# Altium PCB PV_PCB2.PcbDoc
Units mil, origin at the board's own origin, x right, y up, seen from the top; angles counter-clockwise.
Board outline 6055 x 4425 mil, 2 copper layers (Top Layer, Bottom Layer); 127 components, 83 nets, 389 pads, 37 vias.
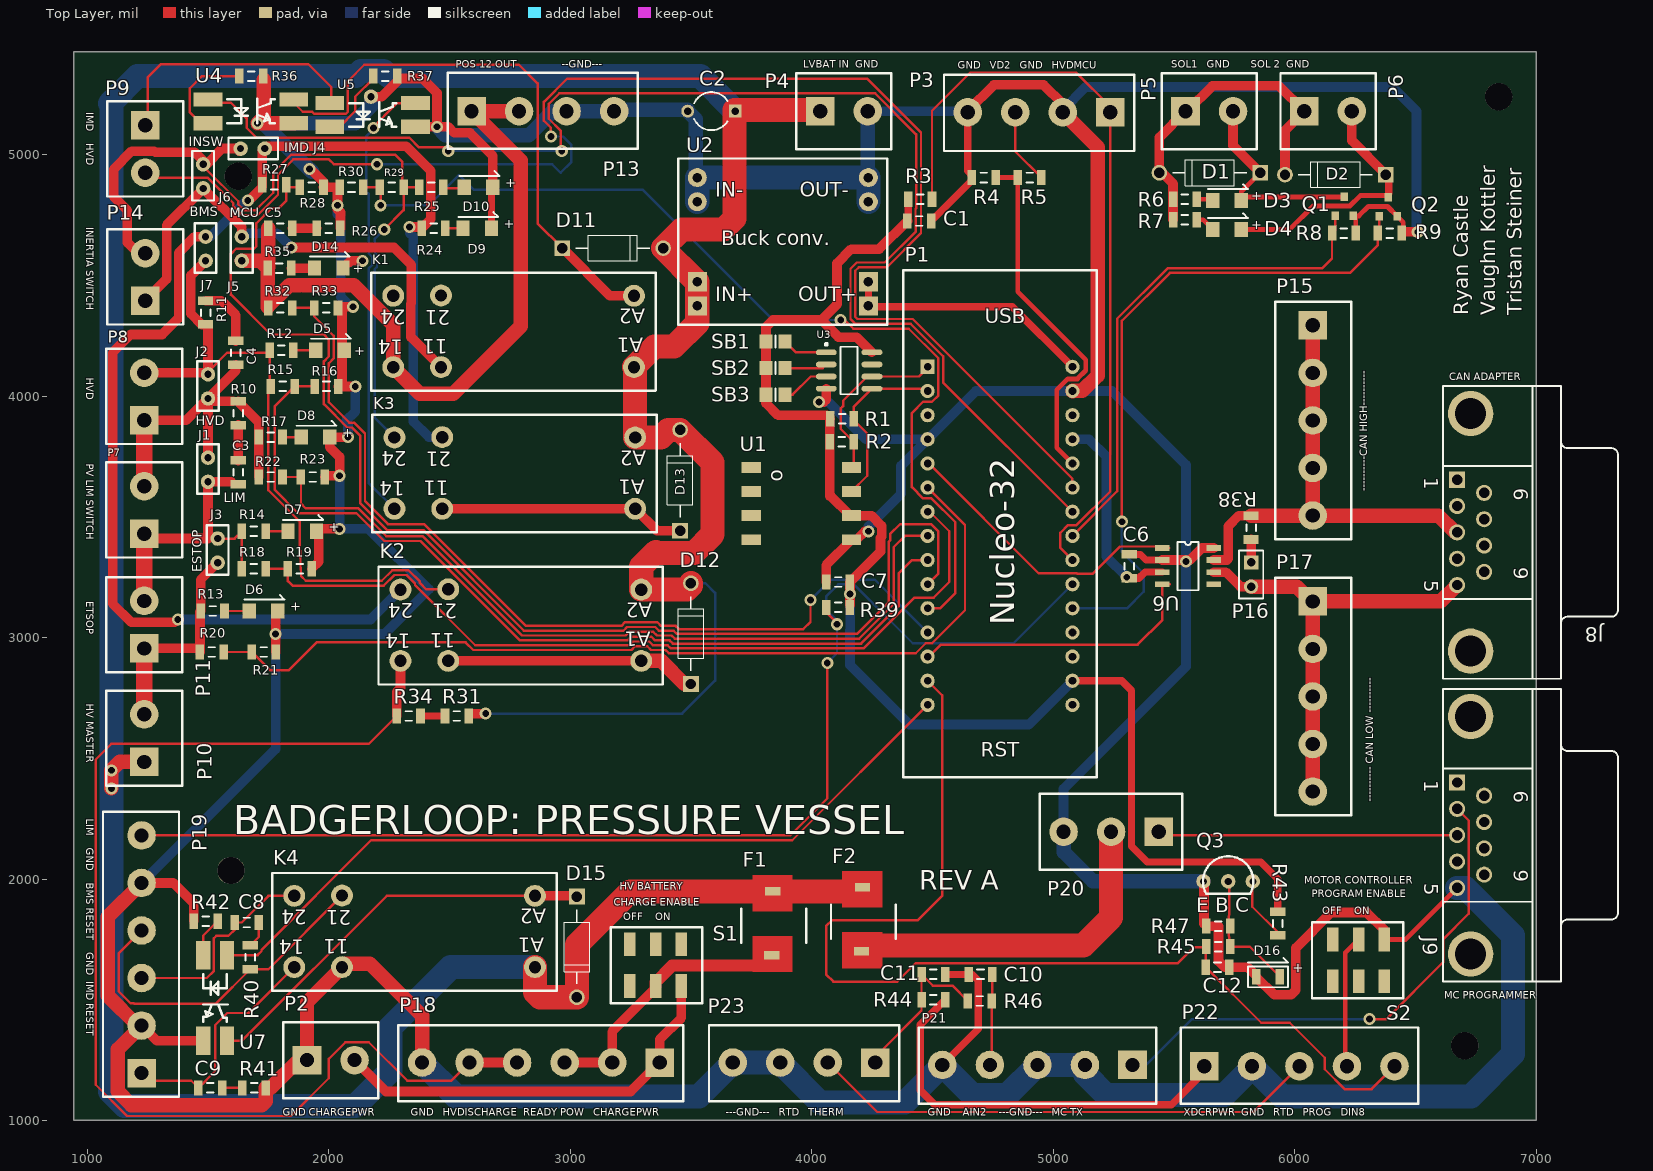
[diagram p0: Top Layer view]
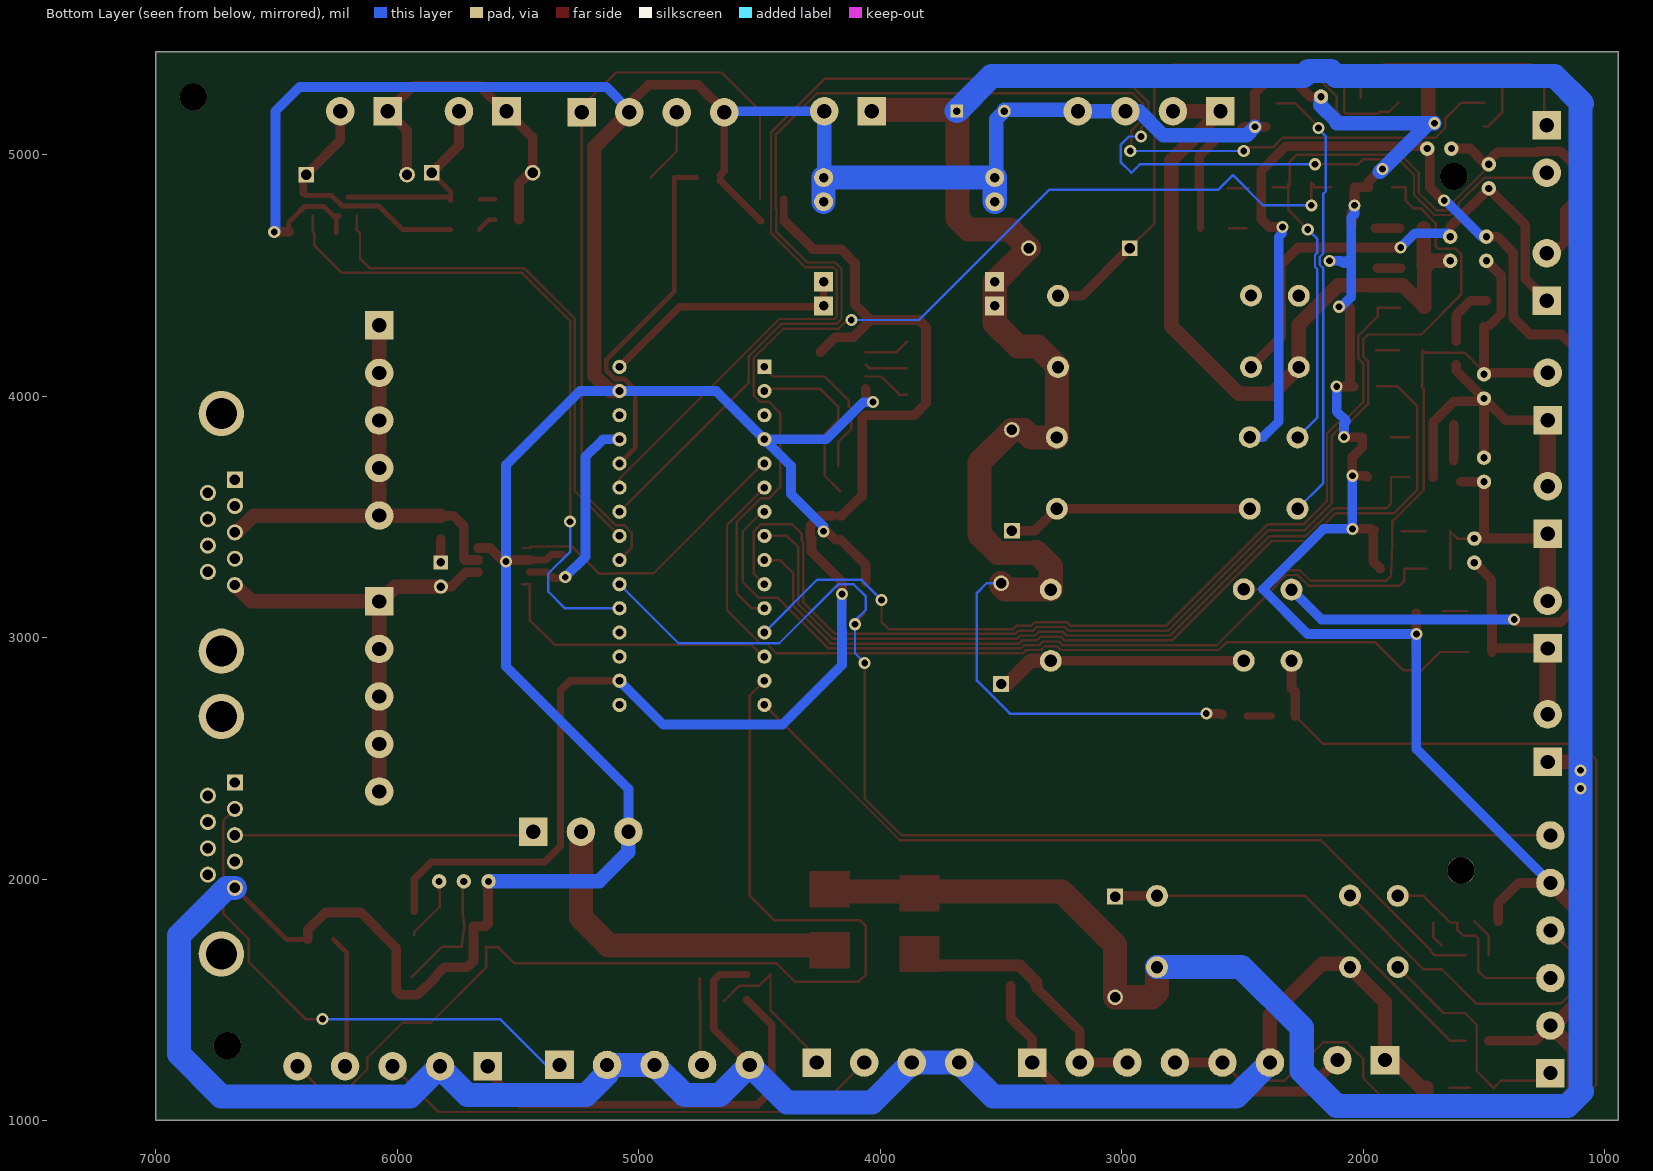
[diagram p1: Bottom Layer view, seen from below]

## Layer stack, top to bottom
Top Solder: solder mask 0.4, Solder Resist, Dk 3.5
Top Layer: signal copper 1.4
Dielectric 1: dielectric 12.6, FR-4, Dk 4.8
Bottom Layer: signal copper 1.4
Bottom Solder: solder mask 0.4, Solder Resist, Dk 3.5

## Board outline
945,1000 7000,1000 7000,5425 945,5425

## Design rules (kind name [scope] priority, off if disabled: settings)
Clearance [All] p1: gap=10 ignorepadtopadclearanceinfootprint=FALSE except(0: Arc-Hole Track-Hole SMDPad-Hole THPad-Hole Via-Hole Fill-Hole Poly-Hole Region-Hole Text-Hole)
HoleSize [All] p1: absolutevalues=TRUE maxlimit=200 minlimit=1 maxpercent=80.000 minpercent=20.000
PolygonConnect [All] p1: connectstyle=Relief reliefconductorwidth=10 reliefentries=4 polygonreliefangle="90 Angle" airgapwidth=10
RoomDefinition PV_MCU_IO [InComponentClass('PV_MCU_IO')] p1: confinementstyle=ConfineIn formatcopy=TRUE lockcomponents=FALSE outline 720,855 7650,855 7650,5580.94 720,5580.94
RoomDefinition PV_Shutdown_2 [InComponentClass('PV_Shutdown_2')] p2: confinementstyle=ConfineIn formatcopy=TRUE lockcomponents=FALSE outline 785,615 5967.87,615 5967.87,5520 785,5520
RoomDefinition PV_Shutdown [InComponentClass('PV_Shutdown')] p3: confinementstyle=ConfineIn formatcopy=TRUE lockcomponents=FALSE outline 869.21,670 7685,670 7685,5485 869.21,5485
RoomDefinition PV_MotorIO [InComponentClass('PV_MotorIO')] p4: confinementstyle=ConfineIn formatcopy=TRUE lockcomponents=FALSE outline 740,765 7675,765 7675,5505 740,5505
RoomDefinition PV_BMS_IO [InComponentClass('PV_BMS_IO')] p5: confinementstyle=ConfineIn formatcopy=TRUE lockcomponents=FALSE outline 565,1055 7700,1055 7700,5515 565,5515
RoutingVias [All] p1: holewidth=28 width=50 viastyle="Through Hole" minholewidth=28 minwidth=50 maxholewidth=28 maxwidth=50
SilkToSolderMaskClearance [IsPad] p1: minsilkscreentomaskgap=5 clearancetoexposedcopper=TRUE
SolderMaskExpansion [All] p1: expansion=4
Width [All] p1: maxlimit=100 minlimit=10 preferedwidth=10 minimp=50.000000 maximp=50.000000 favimp=50.000000
28 further rules are at their usual default settings.

## Classes and differential pairs
component class PV_Shutdown: C3 C4 C5 D5 D6 D7 D8 D9 D10 D11 D12 D13 D14 J1 J2 J3 J4 J5 J6 J7 K1 K2 K3 P7 P8 P9 P10 P11 P13 P14 R10 R11 R12 R13 R14 R15 R16 R17 R18 R19 R20 R21 R22 R23 R24 R25 R26 R27 R28 R29 R30 R31 R32 R33 R34 R35 R36 R37 U4 U5
component class PV_Shutdown_2: C7 C8 C9 D15 K4 P19 R39 R40 R41 R42 U7
component class PV_MotorIO: C10 C11 C12 D16 F2 J9 P20 P21 P22 P23 Q3 R43 R44 R45 R46 R47 S2
component class PV_MCU_IO: C1 C2 D1 D2 D3 D4 P1 P2 P3 P4 P5 P6 Q1 Q2 R1 R2 R3 R4 R5 R6 R7 R8 R9 SB1 SB2 SB3 U1 U2 U3
component class PV_BMS_IO: C6 F1 J8 P15 P16 P17 P18 R38 S1 U6

## Components (designator, comment, footprint, x,y, rotation, side; value= is the part's Value field where it differs from the comment)
C1 "Cap" 1206 4396.57,4725 r0 top value=100pF
C2 "Cap" CAPR5-4X5 3585,5180 r180 top value=220uF
C3 "Cap" 1206 1625,3635 r90 top value=100nF
C4 "Cap" 1206 1615,4130 r90 top value=100nF
C5 "Cap" 1206 1750,4695 r0 top value=100nF
C6 "Cap" 1206 5315,3344.37 r270 top value=1uF
C7 "Cap" 1206 4060,3230 r0 top value=100pF
C8 "Cap" 1206 1611.57,1820 r0 top value=100nF
C9 "Cap" 1206 1460,1135 r0 top value=100nF
C10 "Cap" 1206 4650,1605 r0 top value=1000pF
C11 "Cap" 1206 4553.43,1605 r180 top value=4700pF
C12 "Cap" 1206 5730,1635 r180 top value=100pF
D1 "Flyback" 1N4007 5854.86,4927.87 r180 top
D2 "Flyback" 1N4007 6375,4920 r180 top
D3 "LED1" "1206 LED" 5720,4810 r0 top
D4 "LED2" "1206 LED" 5720,4690 r0 top
D5 "LED1" "1206 LED" 2005,4190 r0 top
D6 "LED1" "1206 LED" 1730,3110 r0 top
D7 "LED1" "1206 LED" 1890,3440 r0 top
D8 "LED1" "1206 LED" 1945,3830 r0 top
D9 "LED1" "1206 LED" 2615,4695 r0 top
D10 "LED1" "1206 LED" 2620,4865 r0 top
D11 "Diode" 1N4007 2970,4610 r0 top
D12 "Diode" 1N4007 3502.87,2810.14 r90 top
D13 "Diode" 1N4007 3457.87,3445.14 r90 top
D14 "LED1" "1206 LED" 2000,4530 r0 top
D15 "Diode" 1N4007 3025,1925 r270 top
D16 "Diode" "1206 DIODE" 5890,1595 r0 top
F1 "3A Fuse" "1A FUSE HOLDER" 3921.61,1614.13 r90 top
F2 "Fuse 3A" "1A FUSE HOLDER" 4292.68,1630.35 r90 top
J1 "S1011EC-02-ND" "2 Pin Jumper" 1500,3645 r90 top
J2 "S1011EC-02-ND" "2 Pin Jumper" 1500,3990 r90 top
J3 "S1011EC-02-ND" "2 Pin Jumper" 1540,3310 r90 top
J4 "S1011EC-02-ND" "2 Pin Jumper" 1635,5025 r0 top
J5 "S1011EC-02-ND" "2 Pin Jumper" 1640,4560 r90 top
J6 "S1011EC-02-ND" "2 Pin Jumper" 1480,4860 r90 top
J7 "S1011EC-02-ND" "2 Pin Jumper" 1490,4560 r90 top
J8 "D Connector 9" DSUB1.385-2H9 7103.11,3435.47 r270 top
J9 "D Connector 9" DSUB1.385-2H9 7103.11,2181.42 r270 top
K1 "RT444012F-ND" RT444012F 2263,-2670 r90 top
K2 "RT444012F-ND" RT444012F 2292.99,-3886.61 r90 top
K3 "RT444012F-ND" RT444012F 2267.99,-3256.61 r90 top
K4 "RT444012F-ND" RT444012F 1853,-5155 r90 top
P1 "NUCLEO-L432KC" NUCLEO-32 4480,4120.94 r0 top
P2 "Power" "2POS TERM BLOCK" 1910,1250 r0 top
P3 "Header 4" "4POS TERM BLOCK" 5236.85,5175 r180 top
P4 "Battery Input" "2POS TERM BLOCK" 4035,5180 r0 top
P5 "Solenoid 8" "2POS TERM BLOCK" 5548.15,5180 r0 top
P6 "Solenoid 8" "2POS TERM BLOCK" 6040,5180 r0 top
P7 "PV Limit Switch" "2POS TERM BLOCK" 1235.94,3430 r90 top
P8 "HVD Interlock" "2POS TERM BLOCK" 1235.94,3900 r90 top
P9 "Battery Input" "2POS TERM BLOCK" 1240,5121.85 r270 top
P10 "HVMaster" "2POS TERM BLOCK" 1235.94,2485 r90 top
P11 "EStop1" "2POS TERM BLOCK" 1235.94,2955 r90 top
P13 "277-5738-ND" "4POS TERM BLOCK" 2591.3,5179.33 r0 top
P14 "Inertia Switch-NC" "2POS TERM BLOCK" 1240,4395 r90 top
P15 "Header 5" "5POS TERM BLOCK" 6075,4292.8 r270 top
P16 "TERM" HDR1X2 5820,3310.94 r270 top
P17 "Header 5" "5POS TERM BLOCK" 6075,3149.65 r270 top
P18 "Header 6" "6POS TERM BLOCK" 3370.55,1240 r180 top
P19 "Header 6" "6POS TERM BLOCK" 1225,1196.3 r90 top
P20 "Header 3" "3POS TERM BLOCK" 5436.85,2195.94 r180 top
P21 "Header 5" "5POS TERM BLOCK" 5328.7,1230 r180 top
P22 "Header 5" "5POS TERM BLOCK" 5626.3,1224.96 r0 top
P23 "Header 4" "4POS TERM BLOCK" 4263.7,1240 r180 top
Q1 "MOSFET-N" SOT-23-3 6205,4825 r0 top
Q2 "MOSFET-N" SOT-23-3 6387.4,4823.74 r0 top
Q3 "2N3904" BJT 5622.64,1990 r0 top
R1 "Res1" 1206 4175,3905.94 r180 top value=120
R2 "Res1" 1206 4173.43,3810.94 r180 top value=120
R3 "Res1" 1206 4498.43,4815 r180 top value=1K
R4 "Res1" 1206 4663.15,4905 r0 top value=2.2K
R5 "Res1" 1206 4853.15,4905 r0 top value=1K
R6 "Res1" 1206 5595,4815 r180 top value=1K
R7 "Res1" 1206 5595,4730 r180 top value=1K
R8 "Res1" 1206 6253.43,4675 r180 top value=10K
R9 "Res1" 1206 6443.43,4675 r180 top value=10K
R10 "Res1" 1206 1625,3880 r90 top value=1K
R11 "Res1" 1206 1490,4395 r270 top value=1K
R12 "Res1" 1206 1755,4190 r0 top value=1K
R13 "Res1" 1206 1470,3110 r0 top value=1K
R14 "Res1" 1206 1640,3440 r0 top value=1K
R15 "Res1" 1206 1858.43,4040 r180 top value=.3793K
R16 "Res1" 1206 2040,4040 r180 top value=1K
R17 "Res1" 1206 1710,3830 r0 top value=1K
R18 "Res1" 1206 1738.43,3285 r180 top value=.3793K
R19 "Res1" 1206 1929.53,3285 r180 top value=1K
R20 "Res1" 1206 1565,2940 r180 top value=.3793K
R21 "Res1" 1206 1780,2940 r180 top value=1K
R22 "Res1" 1206 1808.43,3665 r180 top value=.3793K
R23 "Res1" 1206 1983.43,3665 r180 top value=1K
R24 "Res1" 1206 2385,4695 r0 top value=1K
R25 "Res1" 1206 2375,4865 r0 top value=1K
R26 "Res1" 1206 1950,4695 r0 top value=2K
R27 "Res1" 1206 1823.43,4875 r180 top value=.3793K
R28 "Res1" 1206 1978.43,4865 r180 top value=1K
R29 "Res1" 1206 2211.57,4865 r0 top value=.3793K
R30 "Res1" 1206 2045,4865 r0 top value=1K
R31 "Res1" 1206 2580,2675 r180 top value=1K
R32 "Res1" 1206 1848.43,4365 r180 top value=.3793K
R33 "Res1" 1206 2038.43,4365 r180 top value=1K
R34 "Res1" 1206 2281.57,2675 r0 top value=0
R35 "Res1" 1206 1845,4530 r180 top value=1K
R36 "Res1" 1206 1630,5325 r0 top value="180 Ohm"
R37 "Res1" 1206 2185,5325 r0 top value="48.7 Ohm"
R38 "Res1" 1206 5820,3405.94 r90 top value=120
R39 "Res1" 1206 4060,3125 r0 top value=1K
R40 "Res1" 1206 1675,1626.57 r90 top value=1K
R41 "Res1" 1206 1740,1135 r180 top value=1K
R42 "Res1" 1206 1540,1825 r180 top value="180 Ohm"
R43 "Res1" 1206 5930,1766.57 r90 top value=10K
R44 "Res1" 1206 4455,1500 r0 top value=300K
R45 "RES1" 1206 5635,1720 r0 top value=10.0K
R46 "Res1" 1206 4646.57,1495 r0 top value=41.2K
R47 "Res1" 1206 5635,1805 r0 top value=4.7K
S1 "JS202011SCON" JS202011SCON 3452.13,1556.77 r180 top
S2 "JS202011SCON" JS202011SCON 6166.57,1750 r0 top
SB1 "Res1" 6-0805_M 3850,4225.94 r180 top value=0
SB2 "Res1" 6-0805_M 3850,4115.94 r180 top value=0
SB3 "Res1" 6-0805_M 3850,4005.94 r180 top value=0
U1 "SSCMNNN030PA2A3" 8-SMT 3750,3405 r90 top
U2 "MP1584EN Breakout Board" "MP1584EN BREAKOUT" 3526.34,4905 r0 top
U3 "CAT24C32" SO8_N 4155,4105.94 r0 top
U4 "TPC817" 4-SOP 1500,5228.43 r0 top
U5 "TPC817" 4-SOP 2005,5213.43 r0 top
U6 "MCP2561" 8-SOIC 5452.4,3370.94 r0 top
U7 "TPC817" 4-SOP 1578.43,1685 r270 top

## Footprints (in the part's own frame and the unit in brackets; to place one, negate y for a bottom-side part, rotate by r counter-clockwise, add the part's x,y. Pads: shape width x height; smd on the part's side, far side on the other; paste and mask are expansions set on the pad)
"1A FUSE HOLDER" [mm] "0154001.DR"
  rect 0.9x1.6 smd: 1(1.8,2.2) 2(8.5,2.1)
  Top Layer region: 6.4,0 10.21,0 10.21,4.24 6.4,4.24
  Top Layer region: 0,0 3.81,0 3.81,4.24 0,4.24
  silkscreen extent 3.1,-1.4 6.7,5.4
1N4007 [mm] "DIODE"
  rect 1.65x1.65 hole 1.1: 1(-0.063,0.073)
  round 1.65 hole 1.1: 2(10.537,0.073)
  silkscreen extent 1.34,-1.28 9.14,1.42
"2 Pin Jumper" [mil]
  round 60 hole 30: 1(0,0) 2(100,0)
  silkscreen extent -50,-45 155,45, body extent -50,-51 150,45, height 344
"2POS TERM BLOCK" [mm] "5mm Pitch"
  rect 3x3 hole 1.5: 1(0,0)
  round 3 hole 1.5: 2(5,0)
  silkscreen extent -2.5,-4 7.5,4, body extent -2.51,-4.57 8.09,4.43, height 12.6
"3POS TERM BLOCK" [mm] "5mm Pitch"
  rect 3x3 hole 1.5: 1(0,0)
  round 3 hole 1.5: 2(5,0) 3(10,0)
  silkscreen extent -2.5,-4 12.5,4, body extent -3.03,-4.56 12.49,4.44, height 12.6
4-SOP [mm] "TPC817"
  rect 3x1.5 smd: 1(0,0) 2(0,-2.5) 3(9,0) 4(9,-2.5)
  silkscreen extent 2,-2.5 7,0.1, body extent -0.7,-3.7 9.6,1, height 2
"4POS TERM BLOCK" [mm]
  rect 3x3 hole 1.5: 1(0,0)
  round 3 hole 1.5: 2(5,0) 3(10,0) 4(15,0)
  silkscreen extent -2.5,-3.94 17.5,4.06, body extent -2.55,-4.55 18.05,4.45, height 3.8
"5POS TERM BLOCK" [mm]
  rect 3x3 hole 1.5: 1(0,0)
  round 3 hole 1.5: 2(5,0) 3(10,0) 4(15,0) 5(20,0)
  silkscreen extent -2.5,-3.94 22.5,4.06
6-0805_M [mm] "Chip Resistor, Body 2.0x1.2mm, IPC Low Density"
  rect 1.4x1.5 smd: 1(-1,0) 2(1,0)
  silkscreen extent 0,-0.65 0,0.65, body extent -1.07,-0.7 1.07,0.7, height 0.7
"6POS TERM BLOCK" [mm] "5mm"
  rect 3x3 hole 1.5: 1(0,0)
  round 3 hole 1.5: 2(5,0) 3(10,0) 4(15,0) 5(20,0) 6(25,0)
  silkscreen extent -2.5,-3.94 27.5,4.06, body extent -3.11,-4.55 27.49,4.45, height 12.87
8-SMT [mm]
  rect 1.15x2.04 smd: 1(0,-10.54) 2(2.54,-10.54) 3(5.08,-10.54) 4(7.62,-10.54) 5(7.62,0) 6(5.08,0) 7(2.54,0) 8(0,0)
  body extent -1.35,-12 8.55,1.46, height 5.44
8-SOIC [mm]
  rect 1.55x0.6 smd: 1(0,0) 2(0,-1.27) 3(0,-2.54) 4(0,-3.81) 5(5.4,-3.81) 6(5.4,-2.54) 7(5.4,-1.27) 8(5.4,0)
  silkscreen extent 1.61,-4.44 3.79,0.64
1206 [mm] "1206 SMD Resistor"
  rect 0.9x1.6 smd: 1(0,0) 2(2.5,0)
  silkscreen extent 0.9,-0.5 1.6,0.5
"1206 DIODE" [mm]
  rect 0.9x1.6 smd: 1(-1.25,0) 2(1.25,0)
  silkscreen extent -2.1,-1.1 2.1,2, body extent -1.4,-0.8 1.5,0.8, height 1
"1206 LED" [mm]
  rect 1.4x1.6 smd: 1(-1.5,0) 2(1.5,0)
  silkscreen extent -2,1.2 2.2,1.7, body extent -1.4,-0.8 1.5,0.8, height 1
BJT [mil]
  round 60 hole 30: 1(0,0) 2(102.36,0) 3(204.72,0)
  silkscreen extent -2,-50 207,104
CAPR5-4X5 [mm] "Capacitor; 2 Leads"
  rect 1.35x1.35 hole 0.8: 1(-2.5,0)
  round 1.35 hole 0.8: 2(2.5,0)
  silkscreen extent -1.69,-2 1.82,2
DSUB1.385-2H9 [mm] "Connector; D Subminiature; 9 Position; Right Angle; Pitch 1.385 mm"
  rect 1.69x1.69 hole 1.09: 1(-5.54,-10.92)
  round 1.69 hole 1.09: 2(-2.77,-10.92) 3(0,-10.92) 4(2.77,-10.92) 5(5.54,-10.92) 6(-4.155,-8.08) 7(-1.385,-8.08) 8(1.385,-8.08) 9(4.155,-8.08)
  round 4.76 hole 3.26: 10(-12.495,-9.5) 11(12.495,-9.5)
  silkscreen extent -15.4,-12.4 15.4,6
HDR1X2 [mm] "Connector; Header; 2 Position"
  rect 1.5x1.5 hole 0.9: 1(0,0)
  round 1.5 hole 0.9: 2(2.54,0)
  silkscreen extent -1.27,-1.27 3.81,1.27
JS202011SCON [mm]
  rect 1.2x2.5 smd: 1(-0.2,-4.4) 2(2.5,-4.4) 3(5.2,-4.4) 4(5.2,0) 5(2.5,0) 6(-0.2,0)
  silkscreen extent -2.4,-6.2 7.2,1.8, body extent -2.1,-5.8 6.9,1.26, height 4.27
"MP1584EN BREAKOUT" [mm] "Buck Converter"
  round 2 hole 1: 0(0,-2.54) 0(0,0) 2(18,-2.54) 2(18,0)
  rect 2x2 hole 1: 1(0,-13.5) 1(0,-10.96) 3(18,-13.5) 3(18,-10.96)
  silkscreen extent -2,-15.5 20,2
NUCLEO-32 [mm]
  rect 1.5x1.5 hole 0.8: 1(0,0)
  round 1.5 hole 0.8: 2(0,-2.54) 3(0,-5.08) 4(0,-7.62) 5(0,-10.16) 6(0,-12.7) 7(0,-15.24) 8(0,-17.78) 9(0,-20.32) 10(0,-22.86) 11(0,-25.4) 12(0,-27.94) 13(0,-30.48) 14(0,-33.02) 15(0,-35.56) 16(15.24,-35.56) 17(15.24,-33.02) 18(15.24,-30.48) 19(15.24,-27.94) 20(15.24,-25.4) 21(15.24,-22.86) 22(15.24,-20.32) 23(15.24,-17.78) 24(15.24,-15.24) 25(15.24,-12.7) 26(15.24,-10.16) 27(15.24,-7.62) 28(15.24,-5.08) 29(15.24,-2.54) 30(15.24,0)
  silkscreen extent -2.54,-43.18 17.78,10.16, body extent -1.67,-40.6 16.87,9.69, height 5
RT444012F [mm] "RELAY GEN PURPOSE DPST 8A 12V"
  round 2.3 hole 1.3: 1(172.466,-25.425) 2(179.966,-25.425) 3(172.466,-5.131) 4(172.466,-0.102) 5(180,-5.131) 6(179.966,-0.102)
  silkscreen extent 169.98,-27.71 182.37,2.21, body extent 170.3,-27.3 182.1,1.9, height 10
SO8_N [mm] "SOIC, 8-Leads, Body 4.9x3.9mm, Pitch 1.27mm, IPC Medium Density"
  oval 2.2x0.6 smd: 1(-2.4,1.905) 2(-2.4,0.635) 3(-2.4,-0.635) 4(-2.4,-1.905) 5(2.4,-1.905) 6(2.4,-0.635) 7(2.4,0.635) 8(2.4,1.905)
  silkscreen extent -2.52,-2.5 0.9,2.88, body extent -2,-2.5 2,2.5, height 1.75
SOT-23-3 [mm] "MOSFET"
  rect 0.8x0.9 smd: D(0,0) G(-0.95,-2) S(0.95,-2)

## Part data
C1 C2 C3 C4 C5 C6 C7 C8 C9 C10 C11 C12: "Capacitor", LatestRevisionDate=17-Jul-2002, LatestRevisionNote="Re-released for DXP Platform.", PackageDescription="Radial Cap, Thru-Hole; 2 Leads; 0.3 in Pin Spacing", PackageReference=RAD-0.3, Published=8-Jun-2000, Publisher="Altium Limited"
D1 D2: library part Diode, "Default Diode", Code_JEDEC=DO-214-AB, LatestRevisionDate=17-Jul-2002, LatestRevisionNote="Re-released for DXP Platform.", PackageDescription="DO-214-AB/SMC; 2 C-Bend Leads; Body 7.9 x 5.9 mm, inc. leads (LxW)", PackageReference=SMC, PackageVersion=Sep-1996, Published=8-Jun-2000, Publisher="Altium Limited"
D3: library part LED2, "Typical RED, GREEN, YELLOW, AMBER GaAs LED", LatestRevisionDate=17-Jul-2002, LatestRevisionNote="Re-released for DXP Platform.", PackageDescription="SM LED; 2 Flat Leads", PackageReference=3.2X1.6X1.1, PackageVersion=Feb-2002, Published=8-Jun-2000, Publisher="Altium Limited"
D4: "Typical RED, GREEN, YELLOW, AMBER GaAs LED", LatestRevisionDate=17-Jul-2002, LatestRevisionNote="Re-released for DXP Platform.", PackageDescription="SM LED; 2 Flat Leads", PackageReference=3.2X1.6X1.1, PackageVersion=Feb-2002, Published=8-Jun-2000, Publisher="Altium Limited"
D5 D6 D7 D8 D9 D10 D14: "Typical RED GaAs LED", LatestRevisionDate=08-Jul-2005, LatestRevisionNote="Mech Layer 1 removed.", PackageDescription="LED; 2 Leads", PackageReference=LED-1, Published=8-Jun-2000, Publisher="Altium Limited"
D11 D12 D13 D15 D16: "Default Diode", Code_JEDEC=DO-214-AB, LatestRevisionDate=17-Jul-2002, LatestRevisionNote="Re-released for DXP Platform.", PackageDescription="DO-214-AB/SMC; 2 C-Bend Leads; Body 7.9 x 5.9 mm, inc. leads (LxW)", PackageReference=SMC, PackageVersion=Sep-1996, Published=8-Jun-2000, Publisher="Altium Limited"
F1 F2: library part "Fuse 1", "Fuse", LatestRevisionDate=17-Jul-2002, LatestRevisionNote="Re-released for DXP Platform.", PackageDescription="Thru-Hole; 2 Leads", PackageReference=PIN-W2/E2.8, Published=8-Jun-2000, Publisher="Altium Limited"
  F1: ComponentLink1Description=Digikey, ComponentLink1URL=F1226CT-ND
  F2: ComponentLink1Description="Digikey- FUSE", ComponentLink1URL=https://www.digikey.com/product-detail/en/littelfuse-inc/0451001.MRL/F2577CT-ND/813055, ComponentLink2Description="Digikey - Holder", ComponentLink2URL=https://www.digikey.com/product-detail/en/littelfuse-inc/0154001.DR/F1222TR-ND/183352
J1 J2 J3 J4 J5 J6 J7: "CONN HEADER .100\" SNGL STR 2POS", ComponentLink1Description="Male- Digikey", ComponentLink1URL=https://www.digikey.com/product-detail/en/sullins-connector-solutions/PRPC002SAAN-RC/S1011EC-02-ND/2775252, ComponentLink2Description="Female - Digikey", ComponentLink2URL=https://www.digikey.com/products/en?keywords=S9001-ND
J8 J9: "Receptacle Assembly, 9 Position, Right Angle", PackageDocument=O, DatasheetDocument=1-Sep-1999, Gender=Receptacle, LatestRevisionDate=17-Jul-2002, LatestRevisionNote="Re-released for DXP Platform.", Orientation="Right Angle", PackageReference=788750, Positions=9, Published=15-Jun-2001, Publisher="Altium Limited"
K1 K2 K3 K4: "RELAY GEN PURPOSE DPST 8A 12V", ComponentLink1Description=Digikey, ComponentLink1URL=https://www.digikey.com/product-detail/en/te-connectivity-potter-brumfield-relays/RT444012F/RT444012F-ND/1427665
P1: "STM32L432KC Development Board", ComponentLink1Description=MBED, ComponentLink1URL=https://os.mbed.com/platforms/ST-Nucleo-L432KC/, ComponentLink2Description=Digikey, ComponentLink2URL=https://www.digikey.com/products/en?keywords=NUCLEO-L432KC
P2 P4 P5 P6 P9 P16: library part "Header 2", "Header, 2-Pin", LatestRevisionDate=17-Jul-2002, LatestRevisionNote="Re-released for DXP Platform.", Publisher="Altium Limited"
P3 P23: "Header, 4-Pin", LatestRevisionDate=17-Jul-2002, LatestRevisionNote="Re-released for DXP Platform.", Publisher="Altium Limited"
P7 P8 P10 P11 P14: library part "Header 2", "277-5733-ND", LatestRevisionDate=17-Jul-2002, LatestRevisionNote="Re-released for DXP Platform.", Publisher="Altium Limited"
  P14: ComponentLink1Description="Electric Motor Sport", ComponentLink1URL=http://www.electricmotorsport.com/resettable-inertia-switch-crash-sensor-kit.html
P13: library part "Header 4", "Header, 4-Pin", LatestRevisionDate=17-Jul-2002, LatestRevisionNote="Re-released for DXP Platform.", Publisher="Altium Limited"
P15 P17 P21 P22: "Header, 5-Pin", LatestRevisionDate=17-Jul-2002, LatestRevisionNote="Re-released for DXP Platform.", Publisher="Altium Limited"
P18 P19: "Header, 6-Pin", LatestRevisionDate=17-Jul-2002, LatestRevisionNote="Re-released for DXP Platform.", Publisher="Altium Limited"
P20: "Header, 3-Pin", LatestRevisionDate=17-Jul-2002, LatestRevisionNote="Re-released for DXP Platform.", Publisher="Altium Limited"
Q1 Q2: "N-Channel MOSFET", LatestRevisionDate=17-Jul-2002, LatestRevisionNote="Re-released for DXP Platform.", PackageDescription="TO, Flat Index; 3 In-Line, Axial Leads; Body Dia. 4.6mm; Lead Dia. 0.5 mm (max)", PackageReference=E3, PackageVersion=1995/1996, Published=8-Jun-2000, Publisher="Altium Limited"
Q3: "NPN General Purpose Amplifier", ComponentLink1Description="Manufacturer Link", ComponentLink1URL=http://www.fairchildsemi.com/, ComponentLink2Description=Datasheet, ComponentLink2URL=http://www.fairchildsemi.com/ds/2N%2F2N3904.pdf, DatasheetVersion=1997, LatestRevisionDate=15-Jan-2003, LatestRevisionNote="PCB Footprint 'BCY-W3/D4.7' replaced", PackageDescription="TO, Flat Index; 3 In-Line, Axial Leads; Body Dia. 4.5mm; Leads 0.51 x 0.48 mm (max)", PackageReference=TO-92A, PackageVersion=Sep-1998, Published=8-Jun-2000, Publisher="Altium Limited"
R1 R2 R3 R4 R5 R6 R7 R8 R9 R10 R11 R12 R13 R14 R15 R16 R17 R18 R19 R20 R21 R22 R23 R24 R25 R26 R27 R28 R29 R30 R31 R32 R33 R34 R35 R36 R37 R38 R39 R40 R41 R42 R43 R44 R46 R47 SB1 SB2 SB3: "Resistor", LatestRevisionDate=17-Jul-2002, LatestRevisionNote="Re-released for DXP Platform.", PackageDescription="Axial Device, Thru-Hole; 2 Leads; 0.3 in Pin Spacing", PackageReference=AXIAL-0.3, Published=8-Jun-2000, Publisher="Altium Limited"
R45: library part Res1, "Resistor", LatestRevisionDate=17-Jul-2002, LatestRevisionNote="Re-released for DXP Platform.", PackageDescription="Axial Device, Thru-Hole; 2 Leads; 0.3 in Pin Spacing", PackageReference=AXIAL-0.3, Published=8-Jun-2000, Publisher="Altium Limited"
S1 S2: "DPST Switch", ComponentLink1Description=Digikey, ComponentLink1URL=https://www.digikey.com/product-detail/en/c-k/JS202011SCQN/401-2002-1-ND/1640098
U1: "Honeywell Digital Pressure Sensor", ComponentLink1Description=Part, ComponentLink1URL=https://www.digikey.com/product-detail/en/honeywell-sensing-and-productivity-solutions/SSCMNNN030PA2A3/480-6407-ND/2416123, ComponentLink2Description=Datasheet, ComponentLink2URL=https://sensing.honeywell.com/index.php?ci_id=151134
U2: "Buck Converter", ComponentLink1Description=Part, ComponentLink1URL=https://www.amazon.com/eBoot-MP1584EN-Converter-Adjustable-Module/dp/B01MQGMOKI/
U3: "I2C EEPROM", ComponentLink1Description=Part, ComponentLink1URL=https://www.digikey.com/product-detail/en/on-semiconductor/CAT24C32WI-GT3/CAT24C32WI-GT3CT-ND/1631159, ComponentLink2Description=Datasheet, ComponentLink2URL=http://www.onsemi.com/pub/Collateral/CAT24C32-D.PDF
U4 U5 U7: "Opto-Coupler", ComponentLink1Description=Digi-Key, ComponentLink1URL=https://www.digikey.com/product-detail/en/taiwan-semiconductor-corporation/TPC817S1D-RAG/TPC817S1D-RAGCT-ND/7359685, ComponentLink2Description=Datasheet, ComponentLink2URL=http://www.taiwansemi.com/products/datasheet/TPC817%20SERIES_C1612.pdf
U6: "CAN Transciever", ComponentLink1Description=Part, ComponentLink1URL=https://www.digikey.com/product-detail/en/microchip-technology/MCP2561-E-SN/MCP2561-E-SN-ND/4079961, ComponentLink2Description=Datasheet, ComponentLink2URL=http://ww1.microchip.com/downloads/en/DeviceDoc/20005167C.pdf

## Free pads (board coordinates)
  round 60 hole 30: 2(2175,5240)
  round 113 hole 113 unplated: H(1595,2035) H(1625,4910) H(6705,1310) H(6845,5240)

## Via types
v1: diameter 50, hole 28, Top Layer to Bottom Layer, 37 vias

## Nets (pads, with @x,y where several pads share a name; then routed paths per layer and width w, separated by ;. In a path a pad name is that pad's centre, name@x,y a point inside that pad or via, vN(x,y) a via of type N, cw(c..) or ccw(c..) an arc to the next point about the centre after c; other vN are vias at no path point)
24V+: D1.2 D2.2 P5.1 P6.1 R6.2 R7.2 | length 1399.8
  Top Layer w10: P5.1 P5.1@5555,5180
  Top Layer w40: R7.2 R6.2 5496.57,4880 5451.57,4925 D1.2 5440,5071.85 P5.1 ; P5.1@5555,5180 5660,5285 5935,5285 P6.1 5960.14,5100.14 D2.2
AIN2: C10.2 P21.4 R46.2 | length 364.3
  Top Layer w10: P21.4 4745,1236.85 R46.2 4748.43,1498.43 C10.2@4748.43,1590
BMS_STAT_FDBK: P1.10 R27.1 R28.2 | length 5130.8
  Top Layer w10: R28.2 1823.43,4865 1823.43,4808.43 1793.5,4778.5 1763.07,4778.5 1700,4715.43 1700,4620 1690,4610 1616.36,4610 1595,4588.64 1595,4420 1760,4255 1980,4255 2000,4235 2000,4163.79 1980,4143.79 1980,3966.72 2076.72,3870 2096.57,3870 2130,3836.57 2130,3556.57 2241.57,3445 2391.81,3445 2808.43,3028.39 3220.61,3028.39 3235.89,3043.66 3352.1,3043.66 3367.37,3028.39 3428.39,3028.39 3441.78,3015 4188.28,3015 4320,3146.72 4320,3397.72 4325,3402.72 4325,3428.28 4366.72,3470 4493.92,3470 4524.53,3439.39 4524.53,3265.47 P1.10
CAN1_H: J8.3 P15.1 P15.2 P15.3 P15.4 P15.5 R38.2 U6.7 | length 1980
  Top Layer w10: P15.5@6073.98,3504.37 P15.5
  Top Layer w40: U6.7 5720,3320.94 5725.51,3326.46 5725.51,3461.46 5768.43,3504.37 R38.2
  Top Layer w60: R38.2 P15.5@6073.98,3504.37 ; P15.1 P15.2 P15.3 P15.4 P15.5 6594.61,3505.39 6664.53,3435.47 J8.3
CAN1_L: J8.5 P16.2 P17.1 P17.2 P17.3 P17.4 P17.5 U6.6 | length 1872.2
  Top Layer w10: P17.1@6075,3144.65 P17.1@6081.3,3150.94
  Top Layer w40: U6.6 5715,3270.94 5775,3210.94 P16.2
  Top Layer w60: P16.2 6008.7,3210.94 6075,3144.65 P17.2 P17.3 P17.4 P17.5 ; P17.1@6081.3,3150.94 6605.94,3150.94 J8.5@6672.36,3217.36
CAN1_RX: P1.13 U6.4 | length 1215.9
  Top Layer w10: P1.13@4480,2915.94 4535,2970.94 5350,2970.94 5452.4,3073.35 U6.4 5483.1,3220.94
CAN1_TX: P1.5 U6.1 | length 1235.8
  Top Layer w10: P1.5@4480,3715.94 4490,3715.94 4940.47,3265.47 5098.44,3265.47 5098.92,3265 5165,3265 5277.09,3377.09 5446.26,3377.09 U6.1 U6.1@5480,3370.94
Charge_Power: P2.2 P18.1 S1.6 | length 1721.1
  Top Layer w40: P2.2 2236.85,1120 3250.55,1120 P18.1 3370.55,1335.55 3460,1425 S1.6
DIN8: C12.2 P1.14 P22.5 R45.1 | length 4435.3
  Top Layer w10: P1.14 4540,2760.94 4540,1930 4440,1830 4085,1830 4060,1805 4060,1605 4090,1575 4354.57,1575 4431.07,1651.5 5516.5,1651.5 5581.57,1716.57 R45.1@5631.57,1716.57 ; R45.1 R45.1@5631.57,1716.57 ; P22.5 6318.74,1130 6207.08,1130 6125,1212.08 6125,1260 5980,1405 5861.57,1405 C12.2 R45.1@5631.57,1716.57
E_STOP_FDBK: P1.7 R18.1 R19.2 | length 3498.1
  Top Layer w10: R18.1 R19.2 1831.1,3233.9 1850,3215 2228.09,3215 2272.03,3258.94 2321.96,3258.94 2357.27,3223.63 2357.27,3217.73 2606.61,2968.39 3245.47,2968.39 3260.74,2983.66 3327.24,2983.66 3342.52,2968.39 3403.54,2968.39 3416.92,2955 4215,2955 4425.47,3165.47 4505.47,3165.47 4570,3230 4570,3440 4489.06,3520.94 P1.7
GND: C1.2 C2.2 C6.1 C7.1 C10.1 C11.1 C12.1 D5.2 D6.2 D7.2 D8.2 D9.2 D10.2 D14.2 D16.1 J9.5 K4.3 P1.4 P1.29 P2.1 P3.2 P3.4 P4.2 P13.3 P13.4 P18.6 P19.2 P19.5 P20.3 P21.2 P21.3 P21.5 P22.2 P23.3 P23.4 pad.2 Q1.S Q2.S Q3.1 R4.1 R8.1 R9.1 R16.1 R19.1 R21.1 R23.1 R26.2 R28.1 R30.1 R33.1 R36.2 R37.2 R41.1 R42.2 R47.1 S2.4 U1.1 U2.0 U2.2 U3.4 U4.4 U5.4 U6.2 U6.8 U7.4 | length 32636.5
  Top Layer w10: P19.2@1218.15,1393.15 P19.2 ; D6.2@1780,3100.94 D6.2 ; R28.1 R28.1@1978.43,4886.57 ; D14.2 D14.2@2079.06,4550 ; R37.2@2283.43,5303.43 R37.2@2283.43,5315 ; D10.2@2674.06,4860 D10.2 ; P13.3 P13.3@2990,5174.33 ; U1.1 U1.1@4185,3405 ; P3.4@4646.3,5180 P3.4@4646.3,5191.3 ; C10.1 C10.1@4665,1605 ; R4.1@4663.15,4893.15 R4.1 R4.1@4663.15,4915 ; C6.1@5315,3344.13 C6.1 ; R47.1@5625,1815 R47.1 ; C12.1 C12.1@5740,1625 ; Q1.S Q1.S@6253.43,4735.24 ; R9.1 6448.43,4680 R9.1@6450,4681.57
  Top Layer w20: Q1.S 6266.26,4746.26 6305,4785 6384.8,4785 Q2.S 6450,4719.8 R9.1@6450,4681.57 ; R8.1 Q1.S@6253.43,4735.24 ; S2.4 6459.88,1750 J9.5
  Top Layer w30: D9.2 D10.2@2674.06,4860 ; C1.2 R4.1@4663.15,4893.15 ; P21.5 4690,1378.7 4690,1580 C10.1@4665,1605 ; C11.1 C10.1 ; P3.4 4646.3,4931.85 R4.1@4663.15,4915 ; C6.1@5315,3344.13 5361.81,3344.13 5385,3320.94 U6.2
  Top Layer w40: P19.2 1287.48,1330.67 U7.4 ; P19.5 1356.3,1983.7 1441.57,1898.43 R42.2 ; R21.1 v1(1780,3015) D6.2@1780,3100.94 ; v1(1920,4940) 1925,4940 R28.1@1978.43,4886.57 ; R19.1 1959.06,3314.53 1959.06,3440 D7.2@1964.06,3445 ; D7.2@1955,3445 D7.2@1964.06,3445 ; R28.1 2036.57,4865 v1(2036.57,4790) 2036.57,4773.43 2048.43,4761.57 R26.2 ; R23.1 1988.43,3670 v1(2045,3670) 2045,3747.8 2004.06,3788.74 D8.2 v1(2080,3830) ; R16.1 R16.1@2055,4040 ; v1(2045,3450) 1969.06,3450 D7.2@1964.06,3445 ; D14.2@2079.06,4550 2089.06,4560 v1(2140,4560) ; v1(2100,4370) 2060,4370 2055,4365 R16.1@2055,4040 ; v1(2110,4040) R16.1@2055,4040 ; pad.2 2220,5240 2283.43,5303.43 2295,5315 2388.76,5315 2448.39,5255.38 v1(2448.39,5115) ; U5.4@2405,5115 v1(2448.39,5115) ; D10.2 2679.06,4995.94 2584.73,5090.27 2519.82,5090.27 2495.09,5115 v1(2448.39,5115) ; v1(4030,3975) 4050,3975 4060.51,3985.51 U3.4 ; C7.1 4060,3300.04 U1.1 ; U1.1@4185,3405 4220,3440 v1(4235,3440) ; P3.4@4646.3,5180 4755.35,5289.06 4960.94,5289.06 5040,5210 P3.2@5040,5180 ; U6.2 5565.94,3320.94 5615.94,3370.94 U6.8 ; R47.1@5625,1815 Q3.1@5625,1990 ; R47.1 5685,1805 5685,1660 5710,1635 C12.1 ; C12.1@5734.21,1635 5805,1635 D16.1@5835,1605 ; D16.1 5915.79,1520 5985,1520 6005,1540 6005,1715 6151.3,1861.3 6298.7,1861.3 6371.3,1788.7 S2.4 ; R9.1@6448.43,4680 v1(6510,4680)
  Top Layer w60: P19.2@1218.15,1393.15 1208.21,1393.15 1085,1516.36 1085,1843.7 P19.5 ; P19.2 1125.94,1294.09 1125.94,1120.68 1183.12,1063.5 1723.5,1063.5 1740,1080 R41.1 1760,1135 1875,1250 P2.1 1910,1490 K4.3 2070,1650 2170,1650 2386.3,1433.7 P18.6 ; R36.2@1730,5310 1730,5155 v1(1705,5130) U4.4 ; P3.2 5185,5030 5185,4085.19 5121.23,4021.42 5081.14,4021.42 P1.29@5080.33,4020.61
  Bottom Layer w10: 2050,4539.06 2060.94,4550 ; pad.2 2190,5210 ; P13.4 P13.4@3187.52,5185 ; U2.2@4231.85,4908.15 U2.2@4235,4905 ; P21.5@4541.3,1228.7 P21.5 ; P3.4@4641.3,5180 P3.4 ; P3.2 P3.2@5040,5185 ; P21.2@5131.85,1193.15 P21.2
  Bottom Layer w40: P19.5 1780,2538.7 v1(1780,3015) 2230,3015 2415,3200 2165,3450 v1(2045,3450) v1(2045,3670) ; v1(2036.57,4790) 2036.57,4753.43 2050,4740 2050,4539.06 2050,4410 2090,4370 v1(2100,4370) ; 2060.94,4550 2070.94,4560 2080.94,4550 2090.94,4560 v1(2140,4560) ; v1(2080,3830) 2080,3885.94 2070,3895.94 2110,3935.94 v1(2110,4040) ; v1(4030,3975) 4070,3975 4224.06,3820.94 P1.4 ; P4.2 P3.4@4641.3,5180 ; v1(4235,3440) 4235,3460 4370,3595 4370,3710.94 P1.4 ; P3.2@5040,5185 5135,5280 6405,5280 6505,5180 6505,4685 v1(6510,4680) ; P20.3 5043.15,2373.15 5550,2880 v1(5550,3315) 5550,3715 5244.06,4020.94 P1.29 4680,4020.94 P1.4
  Bottom Layer w60: v1(1705,5130) v1@1728.99,5130 ; v1(1920,4940) 1921.01,4940 1931.01,4930 1930,4928.99 v1@1728.99,5130 ; pad.2 2178.08,5205 2110,5136.92 2110,5130 v1@1728.99,5130 ; v1(2448.39,5115) 2483.11,5080.27 2829.18,5080.27 2928.23,5179.33 P13.3 P13.4 ; P13.4@3187.52,5185 C2.2@3486.57,5185 ; C2.2 3520,5146.57 3520,4911.34 U2.0@3526.34,4905 ; U2.2@4231.85,4908.15 P4.2 ; P20.3 5043.15,2111.85 5165,1990 Q3.1
  Bottom Layer w100: P18.6 2526.3,1100 3533.15,1100 P23.4 P23.3 4035,1075 4386.3,1075 P21.5 ; U2.0@3526.34,4805 3526.34,4905 4235,4905 U2.2@4235,4805 ; P21.5@4541.3,1228.7 4665,1105 4810,1105 P21.3 P21.2 ; P21.2@5131.85,1193.15 5219.09,1105.91 5710.21,1105.91 5823.15,1218.85 P22.2 5948.11,1100 6730,1100 6905,1275 6905,1765.93 6707.63,1963.31 J9.5
HV_CHARGE_DISCHARGE_ENABLE: K2.4 P18.4 P18.5 R34.1 | length 4972
  Top Layer w10: R34.1 2166.57,2560 1100,2560 1035,2495 1035,1147.98 1164.48,1018.5 1843.5,1018.5 2000,1175 2000,1255.08 2068.97,1324.06 2165.94,1324.06 2325,1165 2508.15,1165 P18.5
  Top Layer w40: R34.1 2281.57,2775 2297.01,2790.43 K2.4 ; P18.5 P18.4
HV_EN_FDBK: P1.12 R32.1 R33.2 | length 3797.4
  Top Layer w10: R32.1 R33.2 1940,4330 2020,4250 2020,4155.5 2000,4135.5 2000,3975 2085,3890 2104.85,3890 2150,3844.85 2150,3564.85 2244.85,3470 2395.1,3470 2816.71,3048.39 3212.33,3048.39 3227.6,3063.66 3360.38,3063.66 3375.66,3048.39 3436.67,3048.39 3450.06,3035 3965,3035 3995,3065 v1(3995,3155)
  Bottom Layer w10: v1(3995,3155) 4080,3240 4260.94,3240 P1.12
HVD_FDBK: P1.9 R15.1 R16.2 | length 3748.2
  Top Layer w10: R16.2 R15.1 1775.71,3957.28 1775.71,3612.58 1873.28,3515 2115,3515 2230,3400 2380.24,3400 2791.86,2988.39 3237.18,2988.39 3252.46,3003.66 3335.53,3003.66 3350.8,2988.39 3411.82,2988.39 3425.21,2975 4204.85,2975 4360,3130.15 4360,3265 4415.94,3320.94 P1.9
HVD_MCU: P1.22 P3.1 R3.1 | length 3233.3
  Top Layer w10: R3.1 4498.43,5181.57 4656.85,5340 5095,5340 5236.85,5198.15 P3.1 5236.85,3606.08 5096.24,3465.47 5061.56,3465.47 5030,3433.92 5030,3370.94 P1.22
HVD_STATUS: P1.25 P9.2 | length 6220.1
  Top Layer w10: P9.2 1240,4905 1498.64,4905 1605,4798.64 1605,4785.15 1640.15,4750 1706.29,4750 1790,4833.71 1790,4916.72 1853.28,4980 2001.07,4980 2021.07,4960 v1(2200,4960) ; v1(2920,5075) 2920,5111.32 2890.94,5140.37 2890.94,5218.29 2987.66,5315 4229.86,5315 4452.72,5092.15 4452.72,4675.08 4310.78,4533.14 4194.68,4533.14 4180.63,4519.09 4180.63,4327.92 4189.42,4319.13 4418.65,4319.13 5080,3657.78 P1.25
  Bottom Layer w10: v1(2200,4960) 2925,4960 2960,4925 3005,4970 3005,5040 2970,5075 v1(2920,5075)
I2C1_SCL: P1.1 R2.1 U1.4 U3.6 | length 703.1
  Top Layer w10: U1.4@4173.43,3709.37 R2.1 4120.71,3863.66 4120.71,3949.14 4130,3958.43 4130,3980.87 4230.08,4080.94 U3.6 4445,4080.94 P1.1@4480,4115.94
I2C1_SDA: P1.2 R1.1 U1.3 U3.5 | length 743.2
  Top Layer w10: U1.3 4230,3670.04 4230,3845 4175,3900 R1.1 4175,3956.46 U3.5 4465,4030.94 P1.2@4480,4015.94
IMD_STAT_FDBK: P1.11 R29.1 R30.2 | length 4127.8
  Top Layer w10: R30.2@2135,4865 R30.2 R29.1@2196.57,4865 ; v1(2215,4790) R29.1@2215,4865 ; v1@4140.63,4311.02 4172.51,4279.13 4402.08,4279.13 4524.53,4156.69 4524.53,4002.5 4498.44,3976.42 4461.42,3976.42 4415,3930 4415,3622.97 4461.56,3576.42 4496.24,3576.42 4595,3477.66 4595,3185 4530.94,3120.94 P1.11 ; R29.1@2196.57,4865 2215,4883.43 R29.1@2215,4865 ; R29.1@2196.57,4865 R29.1 R29.1@2215,4865
  Bottom Layer w10: v1(2215,4790) 2415,4790 2540,4915 2600,4855 3300,4855 3840,4315 v1(4120,4315)
IMD_Status: P9.1 U5.1 | length 1070.4
  Top Layer w10: P9.1 1250,5131.85 1250,5320 1305,5375 1915,5375 2010.67,5279.33 U5.1@2010.67,5234.33
LIM_MCU: P1.21 P19.6 R39.1 | length 5079.1
  Top Layer w10: P19.6 3911.32,2180.55 4065,2334.23 v1(4065,2895) ; R39.1@4065,3100 4105,3060 v1(4105,3055)
  Bottom Layer w10: v1(4065,2895) 4105,2935 v1(4105,3055) 4105,3070 4060,3115 4060,3170 4110,3220 4174.99,3220 4418.58,2976.42 4835.47,2976.42 P1.21
LV_BATT+: C2.1 D11.2 D12.2 D13.2 D15.2 F1.2 F2.2 K1.1 K2.2 K3.2 K4.1 P4.1 P10.1 R31.1 U2.1 | length 16020
  Top Layer w10: R31.1 R31.1@2585,2680 ; K1.1 K1.1@3268.99,4115.01 ; U2.1@3524.22,4473.5 U2.1@3526.34,4473.5 ; P4.1@4030,5185 P4.1 ; F2.2@4193.78,1948.78 F2.2
  Top Layer w40: v1@1095,2445 v1(1100,2450) ; R31.1@2585,2680 2590,2685 v1(2650,2685)
  Top Layer w60: v1(1100,2375) v1@1100,2440 ; v1(1100,2450) 1135,2485 P10.1
  Top Layer w100: K4.1 2854,1531 2874.86,1510.14 D15.2 3027.87,1727.87 3248.78,1948.78 F1.2 F2.2@4193.78,1948.78 ; K1.1 3349,4205 3430,4205 3526.34,4301.34 3526.34,4373.5 U2.1@3526.34,4473.5 ; K1.1@3268.99,4115.01 K3.2 3375,3828.66 3406.34,3860 D13.2 3590,3725 3590,3427.86 3512.33,3350.2 3359.8,3350.2 3355,3355 3293.99,3293.99 K2.2 3483.66,3198.66 3500,3215 D12.2 ; U2.1@3524.22,4473.5 D11.2 3461.99,4690 3635,4690 3680,4735 3680,5185 P4.1@4030,5185
  Bottom Layer w10: v1(2650,2685) 3463.5,2685 3600,2821.5 3600,3185 3560,3225 D12.2
  Bottom Layer w100: K4.1 2505,1635 2255,1385 2255,1205 2110,1060 1154.77,1060 1095,1119.77 1100,1124.77 v1(1100,2375) v1(1100,2450) 1100,5207.28 1095,5212.28 1207.72,5325 2113.21,5325 2134.08,5345.87 2225.92,5345.87 2246.79,5325 3538.43,5325 C2.1
MC_RX: J9.3 P20.1 | length 1242.4
  Top Layer w10: P20.1 5451.38,2181.42 J9.3
MC_TX: J9.2 P21.1 | length 2161.9
  Top Layer w10: v1(6310,1420) 6380,1420 6615,1655 6615,1750 6721.46,1856.46 6721.46,2242.2 J9.2
  Bottom Layer w10: P21.1 5385,1230 5575,1420 v1(6310,1420)
MCU_HV_EN: P1.24 U4.1 | length 5673.4
  Top Layer w10: U4.1@1500.67,5215 1595,5215 1660,5150 1660,5111.36 1701.36,5070 2334.5,5070 2374.5,5030 2495,5030 v1(2495,5015) ; v1@2950.94,5010 2960,5019.06 2960,5099.6 2910.94,5148.65 2910.94,5210 2955,5254.06 4262.52,5254.06 4432.72,5083.86 4432.72,4777.29 4430,4774.57 4430,4741.07 4431.57,4739.5 4431.57,4682.22 4302.5,4553.14 4186.4,4553.14 4160.63,4527.37 4160.63,4319.3 4180.8,4299.13 4410.36,4299.13 4544.53,4164.97 4544.53,4056.42 P1.24
  Bottom Layer w10: v1(2495,5015) v1(2965,5015)
MOTOR_TEMP: C11.2 P23.1 R44.1 R46.1 | length 681.4
  Top Layer w10: P23.1 4263.7,1263.7 4455,1455 R44.1 C11.2 4501.5,1558.5 4583.07,1558.5 R46.1
MSTR_SW_FDBK: P1.6 R20.1 R21.2 | length 3827.2
  Top Layer w10: R20.1 R21.2 1756.57,2865 1835,2865 1950,2980 2566.72,2980 2598.33,2948.39 3253.75,2948.39 3269.03,2963.66 3318.96,2963.66 3334.23,2948.39 3395.25,2948.39 3408.64,2935 4431.08,2935 4472.5,2976.42 4498.44,2976.42 4635,3112.97 4635,3465.94 P1.6 P1.6@4479.06,3620
NetC3_1: C3.1 J1.1 J3.2 P7.1 P11.2 R14.1 R18.2 | length 1162.1
  Top Layer w10: P7.1 P7.1@1255.94,3410 ; J3.2 1610,3410 R14.1 R18.2 ; C3.1@1595,3645 C3.1@1605,3635
  Top Layer w40: P7.1@1255.94,3410 1500,3410 J1.1 C3.1@1595,3645
  Top Layer w70: P11.2 P7.1
NetC3_2: C3.2 R10.1 | length 146.6
  Top Layer w40: C3.2 R10.1
NetC4_1: C4.1 J1.2 J2.1 P7.2 P8.1 R10.2 R17.1 R22.2 | length 1465.5
  Top Layer w10: J2.1 J2.1@1511.57,3978.43
  Top Layer w40: P8.1 1410,3900 J2.1 ; J1.2 J2.1 ; J2.1@1511.57,3978.43 R10.2@1605,3978.43 ; C4.1 1615,4105 J2.1 ; R10.2 1710,3893.43 R17.1 R22.2
  Top Layer w70: P7.2 P8.1
NetC4_2: C4.2 R11.1 | length 256.4
  Top Layer w40: R11.1 1555,4395 1615,4335 C4.2
NetC5_2: C5.2 R26.1 | length 101.6
  Top Layer w40: C5.2 R26.1
NetC8_2: C8.2 R40.2 | length 109.5
  Top Layer w10: R40.2 1710,1760 C8.2
NetC9_2: C9.2 R41.2 | length 83.1
  Top Layer w10: C9.2 R41.2
NetD1_1: D1.1 D3.2 P5.2 Q1.D | length 881.1
  Top Layer w20: D1.1 5779.06,4846.73 D3.2 5794.06,4825 Q1.D
  Top Layer w40: P5.2 5745,5037.32 D1.1
NetD2_1: D2.1 D4.2 P6.2 Q2.D | length 1077.2
  Top Layer w10: Q2.D@6381.14,4830 Q2.D@6390,4838.86
  Top Layer w20: D4.2 5980,4690 6077.28,4787.28 6229.03,4787.28 6271.75,4830 Q2.D@6381.14,4830
  Top Layer w30: D2.1 6390,4904.6 Q2.D@6390,4838.86
  Top Layer w40: P6.2 6236.85,5057.75 D2.1
NetD3_1: D3.1 R6.1 | length 68
  Top Layer w10: D3.1@5655.94,4815 D3.1
  Top Layer w20: R6.1 D3.1@5655.94,4815
NetD4_1: D4.1 R7.1 | length 82.5
  Top Layer w20: R7.1 5620.94,4730 D4.1
NetD5_1: D5.1 R12.2 | length 92.5
  Top Layer w10: R12.2 D5.1
NetD6_1: D6.1 R13.2 | length 102.5
  Top Layer w10: R13.2 D6.1
NetD7_1: D7.1 R14.2 | length 102.5
  Top Layer w10: R14.2 D7.1@1840.94,3440
NetD8_1: D8.1 R17.2 | length 77.5
  Top Layer w10: R17.2 D8.1
NetD9_1: D9.1 R24.2 | length 72.5
  Top Layer w10: R24.2 D9.1
NetD10_1: D10.1 R25.2 | length 87.5
  Top Layer w10: R25.2@2473.43,4860 D10.1@2560.94,4860
NetD11_1: D11.1 K1.2 U4.3 | length 2322.3
  Top Layer w10: U4.3@1855,5215 1892.32,5177.68 1930.94,5177.68 1939.73,5168.9 2070.27,5168.9 2079.06,5177.68 2079.06,5304.06 2147.28,5372.28 2787.72,5372.28 2865,5295 2865,4715.4 D11.1
  Top Layer w40: D11.1 3165.13,4415.28 K1.2
NetD14_1: D14.1 R35.1 | length 95.9
  Top Layer w40: R35.1 D14.1
NetD15_1: D15.1 K4.2 U7.3 | length 1699
  Top Layer w10: U7.3 1640.67,1330.67 2240.28,1930.28 K4.2 ; D15.1@3025.05,1930.28 D15.1
  Top Layer w40: K4.2 D15.1@3025.05,1930.28
NetD16_2: D16.2 Q3.2 R45.2 R47.2 | length 531.2
  Top Layer w10: Q3.2@5723.43,1990 5730,1983.43 5730,1858.57 5723.83,1806.13 5723.56,1803.84 R45.2 5814.21,1720 D16.2
NetF2_1: F2.1 P20.2 | length 1447.4
  Top Layer w100: F2.1 4229.84,1725 5125,1725 5240,1840 P20.2
NetJ2_2: J2.2 J7.1 K2.5 P8.2 R11.2 R12.1 R15.2 | length 2762.5
  Top Layer w10: R11.2@1473.43,4296.57 R11.2 R11.2@1500,4286.57 ; J2.2@1493.15,4096.85 J2.2 1500,4100 1580,4180 1745,4180 R12.1 1755,4045 R15.2 1750,4030 1750,3610 1873.5,3486.5 1874.72,3486.5 1880,3481.21 1880,3398.79 1885,3255 1905,3235 2219.8,3235 2263.74,3278.94 2330.24,3278.94 2377.27,3231.91 2377.27,3226.02 2403.28,3200 K2.5
  Top Layer w40: P8.2 J2.2@1493.15,4096.85 ; R11.2@1473.43,4296.57 1428.5,4341.5 1428.5,4442.08 1429.06,4442.63 1429.06,4499.06 J7.1 ; J2.2@1500,4100 R11.2@1500,4286.57
NetJ3_1: J3.1 P10.2 P11.1 R13.1 R20.2 | length 910.4
  Top Layer w10: R20.2@1451.57,2955 R20.2 ; R13.1@1466.57,3106.57 R13.1
  Top Layer w40: P11.1 R20.2@1451.57,2955 ; R20.2 R13.1@1466.57,3106.57 ; R13.1 1470,3240 J3.1
  Top Layer w70: P10.2 P11.1
NetJ4_1: J4.1 J6.2 K3.6 P14.2 R25.1 R29.2 | length 3401.6
  Top Layer w10: P14.2@1210.04,4591.85 P14.2 ; J6.2@1495,4961.92 1495,4960 1495,4936.92 1625,4806.92 1625,4793.43 1648.43,4770 1698,4770 1770,4842 1770,4925 1845,5000 2275,5000 2305,4970 2305,4875 2310,4880 R29.2 ; v1(2230,4690) 2310,4770 R29.2 ; R25.1 R29.2
  Top Layer w40: P14.2@1210.04,4591.85 1165.94,4635.94 1165.94,4769.06 1110,4825 1110,4940 1184.06,5014.06 1276.89,5014.06 1280.94,5010 1445,5010 J6.2@1495,4960 ; J6.2@1495,4961.92 1558.08,5025 1620,5025 J4.1@1630,5015
  Bottom Layer w10: v1(2230,4690) 2190,4650 2190,4594.85 2200,4584.85 2200,4535.15 2190,4525.15 2190,3910.65 K3.6
NetJ4_2: J4.2 J7.2 K2.6 K3.5 R24.1 R27.2 | length 5539.7
  Top Layer w10: v1(1665,4810) 1670,4810 v1@1680,4820 ; J4.2@1725,5015 J4.2
  Top Layer w40: v1(1375,3075) 1362.8,3062.8 1182.2,3062.8 1105,3140 1105,4180 1180,4255 1310,4255 1378.5,4323.5 1378.5,4462.79 1379.06,4463.34 1379.06,4594.06 1445,4660 J7.2 ; v1@1680,4820 1725,4865 R27.2 J4.2@1725,5015 ; J4.2 1745,5035 2320,5035 2422.72,4932.28 2422.72,4732.72 2390,4700 v1(2335,4700)
  Bottom Layer w10: J7.2 J7.2@1510,4660
  Bottom Layer w40: v1(1375,3075) 2173.33,3075 K2.6 ; J7.2@1510,4660 1660,4810 v1(1665,4810) ; v1(2335,4700) 2335,4675 2350,4660 2350,3895 2415,3830 K3.5
NetJ5_2: J5.2 J6.1 K1.3 P14.1 | length 2082.4
  Top Layer w40: P14.1 1329.06,4484.06 1329.06,4628.74 1328.97,4628.82 1328.97,4707.61 1475,4853.64 1475,4865 J6.1 1640,4700 J5.2 ; v1(1845,4615) 2270,4615 2342.28,4542.72 2342.28,4384.1 2340,4381.82 2340,4245 K1.3
  Bottom Layer w40: J5.2@1635,4665 1640,4665 1650,4675 1785,4675 v1(1845,4615)
NetK3_4: K3.4 U5.3 | length 1891.2
  Top Layer w10: v1(2185,5110) 2180,5105 2175,5105 2283.43,5213.43 U5.3
  Bottom Layer w10: v1(2185,5110) 2185,5105 2155,5075 2155,4848.43 2165,4838.43 2165,4591.57 2180,4576.57 2180,4543.43 2165,4528.43 2165,3640.39 K3.4
NetP1_30: P1.30 U2.3 | length 1051.7
  Top Layer w30: U2.3@4235,4473.5 4235,4373.5 4235,4370 4830.94,4370 P1.30
NetP3_3: P3.3 R5.2 | length 319.9
  Top Layer w10: P3.3@4843.15,5180 4843.15,5013.43 R5.2
NetP16_1: P16.1 R38.1 | length 95
  Top Layer w40: P16.1 R38.1
NetP22_4: P22.4 S2.5 | length 550.7
  Top Layer w20: P22.4 6210,1231.81 6210,1695 S2.5
NetQ3_3: Q3.3 R43.1 | length 267
  Top Layer w10: Q3.3@5824.72,1990 5824.72,1885.28 5930,1780 R43.1
NetR36_1: R36.1 U4.2 | length 433.4
  Top Layer w10: U4.2@1500.67,5116.57 1483.43,5116.57 1425,5175 1425,5275 1475,5325 1616.57,5325 R36.1@1631.57,5310
NetR37_1: R37.1 U5.2 | length 297.8
  Top Layer w10: U5.2 2044.65,5115 2110,5180.35 2110,5240 R37.1@2185,5315
NetR42_1: R42.1 U7.2 | length 164.9
  Top Layer w10: U7.2 1480,1765 R42.1
NetSB1_1: SB1.1 U3.1 | length 189.8
  Top Layer w10: SB1.1 3934.37,4180.94 U3.1
NetSB2_1: SB2.1 U3.2 | length 177.4
  Top Layer w10: SB2.1 4045.51,4115.94 U3.2
NetSB3_1: SB3.1 U3.3 | length 202.2
  Top Layer w10: SB3.1 3920.94,4005.94 3995.94,4080.94 U3.3
PB_BMS_RESET1: K4.5 P19.4 R40.1 | length 1422.7
  Top Layer w10: P19.4 1130,1691.85 1130,1535 1180,1485 1193.42,1485 1194.33,1484.09 1532.52,1484.09 R40.1 1749.97,1626.57 K4.5
PB_BMS_RESET2: C8.1 K4.6 P19.3 | length 881.8
  Top Layer w10: P19.3@1225,1558.15 1256.85,1590 1494.8,1590 1524.53,1619.73 1524.53,1754.53 1535,1765 1585,1765 1611.57,1791.57 C8.1 1639.57,1820 1749.85,1930.28 K4.6
PB_IMD_RESET2: C9.1 K4.4 P19.1 | length 962.6
  Top Layer w10: P19.1@1225,1164.45 1430.55,1164.45 C9.1 1530,1205 1530,1395 1580,1445 1667.02,1445 K4.4
PB_NO1: R31.2 R34.2 | length 101.6
  Top Layer w30: R34.2 R31.2
PB_NO2: D12.1 K2.1 K2.3 | length 1044.7
  Top Layer w40: K2.3 K2.1
  Top Layer w60: K2.1 3376.61,2903.39 3472.32,2807.68 D12.1
PB_NO4: D13.1 K3.1 K3.3 | length 1022.6
  Top Layer w40: K3.3 K3.1 3359.7,3442.68 D13.1
PB_Reset: P1.15 U7.1 | length 3333.9
  Top Layer w10: U7.1 1705.43,1685 1721.5,1701.07 1721.5,1706.5 2175.55,2160.55 3919.61,2160.55 P1.15
POS3V3: C1.1 C7.2 P1.17 R1.2 R2.2 R3.2 R39.2 R43.2 SB1.2 SB2.2 SB3.2 U1.2 U3.8 | length 5897.4
  Top Layer w10: R1.2@4075,3904.37 R1.2 ; U1.2 U1.2@4196.11,3505
  Top Layer w30: C1.1 4400,4728.43 R3.2 ; P1.17 5284.06,2820.94 5325,2780 5325,2135 5390,2070 5860,2070 5930,2000 R43.2
  Top Layer w40: R1.2@4075,3904.37 R2.2 4075,3585 4079.74,3585 4159.74,3505 U1.2 ; R1.2 4062.52,3920 3860.94,3920 3810.63,3970.32 SB3.2 SB2.2 SB1.2 3810.63,4285.63 3840,4315 4040,4315 ; R39.2@4158.43,3135 v1(4158.43,3180) C7.2 4285,3356.57 4285,3412.22 4290,3417.22 4290,3462.78 4247.78,3505 U1.2@4196.11,3505 ; U3.8 4186.3,4244.13 4110.87,4244.13 4040,4315 ; C1.1 4279.71,4608.14 4163.62,4608.14 4105,4549.52 4105,4380 4040,4315
  Bottom Layer w40: v1(4158.43,3180) 4160,3178.43 4160,3032.22 4158.43,3030.64 4158.43,2886.57 4405,2640 4899.06,2640 P1.17
POS5V: C6.2 P1.27 U6.3 | length 852.4
  Top Layer w30: C6.2 5355,3245.94 5380,3270.94 U6.3
  Bottom Layer w40: P1.27 5149.06,3820.94 5220.94,3749.06 5220.94,3334.06 v1(5305,3250)
POS12_OUT: C5.1 J5.1 K1.4 P13.1 P13.2 R32.2 R35.2 | length 3114.6
  Top Layer w10: R32.2@1746.57,4368.43 R32.2@1746.57,4368.93 ; R35.2 R35.2@1750,4533.43 ; C5.1@1746.57,4691.57 C5.1
  Top Layer w60: J5.1 1716.57,4560 R35.2 1746.57,4368.93 1836.14,4458.5 1879.29,4458.5 1880.79,4460 1895.32,4460 1896.82,4458.5 1985.07,4458.5 1986.57,4460 2013.43,4460 2014.93,4458.5 2103.42,4458.5 2181.72,4380.2 2181.72,4379.95 2267.02,4294.66 K1.4 2377.02,4010 2515,4010 2795,4290 2795,4975.63 P13.1 P13.2 ; R35.2@1750,4533.43 C5.1
PV_LIM_FDBK: P1.8 R22.1 R23.2 | length 3341.2
  Top Layer w10: R22.1 R23.2 1885,3555 1905,3535 2123.28,3535 2238.28,3420 2388.53,3420 2800.14,3008.39 3228.9,3008.39 3244.17,3023.66 3343.81,3023.66 3359.09,3008.39 3420.11,3008.39 3433.49,2995 4196.57,2995 4340,3138.43 4340,3375 4385.94,3420.94 P1.8
Ready_Power: F1.1 P18.2 P18.3 S1.5 | length 1132
  Top Layer w40: P18.3 P18.2 3173.7,1367.81 3353.7,1547.81 S1.5
  Top Layer w50: S1.5 3353.7,1572.8 3421.88,1640.98 3790.98,1640.98 F1.1
RTD1: P22.3 P23.2 | length 2116.7
  Top Layer w10: P23.2 4271.85,1035 5830.04,1035 P22.3
SOL1: P1.23 Q1.G R8.2 | length 2150.7
  Top Layer w10: P1.23 5265,3605.94 5265,4320 5475,4530 6115,4530 6155,4570 R8.2 6167.6,4687.6 Q1.G
SOL2: P1.20 Q2.G R9.2 | length 2814.4
  Top Layer w10: v1@5285,3460 v1(5285,3480) 5285,4311.72 5483.28,4510 6230,4510 6345,4625 R9.2 6350,4680 Q2.G
  Bottom Layer w10: P1.20 5305.94,3120.94 5375,3190 5375,3265 5285,3355 v1(5285,3480)
VD2: P1.26 R4.2 R5.1 | length 1492.5
  Top Layer w20: R4.2 R5.1 4853.15,4431.85 5135,4150 5135,4105.9 5100.52,4071.42 5060.43,4071.42 5015,4025.99 5015,3785.94 P1.26
XDCR_PWR: P22.1 R44.2 | length 1699.1
  Top Layer w10: P22.1@5626.3,1201.3 P22.1
  Top Layer w30: R44.2 4450,1396.57 4450,1125 4510,1065 5490,1065 P22.1@5626.3,1201.3
pads on no net: J8.1 J8.2 J8.4 J8.6 J8.7 J8.8 J8.9 J8.10 J8.11 J9.1 J9.4 J9.6 J9.7 J9.8 J9.9 J9.10 J9.11 K1.5 K1.6 P1.3 P1.16 P1.18 P1.19 P1.28 S1.1 S1.2 S1.3 S1.4 S2.1 S2.2 S2.3 S2.6 U1.5 U1.6 U1.7 U1.8 U3.7 U6.5

## Silkscreen, mask and mechanical layers (free items; w line width, h text height)
Top Overlay:
  text "POS 12 OUT" at 2525,5360 h30
  text "--GND---" at 2965,5360 h30
  text "LVBAT IN  GND" at 3965,5360 h30
  text "SOL1   GND       SOL 2  GND" at 5490,5360 h30
  text "GND   VD2   GND   HVDMCU" at 4605,5355 h30
  text "IMD    HVD" at 995,5175 h30 r270
  text "INSW" at 1420,5035 h40
  text "IMD" at 1815,5010 h40
  text "BMS" at 1425,4745 h40
  text "MCU" at 1590,4740 h40
  text "INERTIA SWITCH" at 995,4700 h30 r270
  text "Ryan Castle" at 6720,4335 h60 r90
  text "Vaughn Kottler" at 6830,4335 h60 r90
  text "Tristan Steiner" at 6940,4335 h60 r90
  text "HVD" at 995,4075 h30 r270
  text "CAN ADAPTER" at 6640,4065 h30
  text "HVD" at 1450,3880 h40
  text "PV LIM SWITCH" at 995,3720 h30 r270
  text "----------CAN HIGH----------" at 6300,3605 h30 r90
  text "LIM" at 1565,3560 h40
  text "ESTOP" at 1475,3270 h40 r90
  text "ETSOP" at 995,3150 h30 r270
  text "HV MASTER" at 995,2725 h30 r270
  text "---------- CAN LOW ----------" at 6325,2320 h30 r90
  text "LIM    GND    BMS RESET    GND  IMD RESET" at 995,2250 h30 r270
  text "BADGERLOOP: PRESSURE VESSEL" at 1605,2185 h120
  text "MOTOR CONTROLLER" at 6040,1980 h30
  text "HV BATTERY" at 3205,1955 h30
  text "REV A" at 4445,1955 h80
  text "PROGRAM ENABLE" at 6070,1925 h30
  text "CHARGE ENABLE" at 3180,1890 h30
  text "OFF    ON" at 6115,1855 h30
  text "OFF    ON" at 3220,1830 h30
  text "MC PROGRAMMER" at 6620,1505 h30
  text "GND CHARGEPWR" at 1810,1020 h30
  text "GND   HVDISCHARGE  READY POW   CHARGEPWR" at 2340,1020 h30
  text "---GND---   RTD   THERM" at 3645,1020 h30
  text "GND    AIN2    ---GND---   MC TX" at 4480,1020 h30
  text "XDCRPWR  GND   RTD   PROG   DIN8" at 5540,1020 h30

## Text inside footprints (layer, text, board x,y; h text height)
D3: Top Overlay "+" at 5820,4810 h39.37
D4: Top Overlay "+" at 5820,4690 h39.37
D5: Top Overlay "+" at 2105,4170 h39.37
D6: Top Overlay "+" at 1840.24,3110 h39.37
D7: Top Overlay "+" at 2000.24,3440 h39.37
D8: Top Overlay "+" at 2055.24,3830 h39.37
D9: Top Overlay "+" at 2725.24,4695 h39.37
D10: Top Overlay "+" at 2730.24,4865 h39.37
D14: Top Overlay "+" at 2100,4510 h39.37
D16: Top Overlay "+" at 5992.36,1614.68 h39.37
J8: Top Overlay "6" at 6907.24,3618.74 h59.06 r270; Top Overlay "9" at 6907.24,3291.57 h59.06 r270; Top Overlay "5" at 6537.17,3237.05 h59.06 r270; Top Overlay "1" at 6537.17,3663.43 h59.06 r270
J9: Top Overlay "6" at 6907.24,2364.68 h59.06 r270; Top Overlay "9" at 6907.24,2037.52 h59.06 r270; Top Overlay "5" at 6537.17,1982.99 h59.06 r270; Top Overlay "1" at 6537.17,2409.37 h59.06 r270
K1: Top Overlay "24" at 2319,4358 h60 r180; Top Overlay "14" at 2309,4233 h60 r180; Top Overlay "21" at 2503,4356 h60 r180; Top Overlay "11" at 2493,4235 h60 r180; Top Overlay "A2" at 3310,4361 h60 r180; Top Overlay "A1" at 3303,4241 h60 r180
K2: Top Overlay "24" at 2348.99,3141.39 h60 r180; Top Overlay "14" at 2338.99,3016.39 h60 r180; Top Overlay "21" at 2532.99,3139.39 h60 r180; Top Overlay "11" at 2522.99,3018.39 h60 r180; Top Overlay "A2" at 3339.99,3144.39 h60 r180; Top Overlay "A1" at 3332.99,3024.39 h60 r180
K3: Top Overlay "A1" at 3307.99,3654.39 h60 r180; Top Overlay "A2" at 3314.99,3774.39 h60 r180; Top Overlay "11" at 2497.99,3648.39 h60 r180; Top Overlay "21" at 2507.99,3769.39 h60 r180; Top Overlay "14" at 2313.99,3646.39 h60 r180; Top Overlay "24" at 2323.99,3771.39 h60 r180
K4: Top Overlay "24" at 1909,1873 h60 r180; Top Overlay "14" at 1899,1748 h60 r180; Top Overlay "21" at 2093,1871 h60 r180; Top Overlay "11" at 2083,1750 h60 r180; Top Overlay "A2" at 2900,1876 h60 r180; Top Overlay "A1" at 2893,1756 h60 r180
P1: Top Overlay "USB" at 4716.22,4302.05 h60; Top Overlay "RST" at 4700.47,2506.77 h60; Top Overlay "Nucleo-32" at 4838.27,3050.08 h100 r90
Q3: Top Overlay "E B C" at 5593.36,1862 h60
U1: Top Overlay "o" at 3879.92,3645.16 h60 r90
U2: Top Overlay "OUT+" at 3943.66,4393.19 h60; Top Overlay "IN+" at 3601.14,4393.19 h60; Top Overlay "OUT-" at 3951.54,4826.26 h60; Top Overlay "IN-" at 3601.14,4826.26 h60; Top Overlay "Buck conv." at 3624.76,4625.47 h60